# EAGLE board picasso (EAGLE 7.2.0)
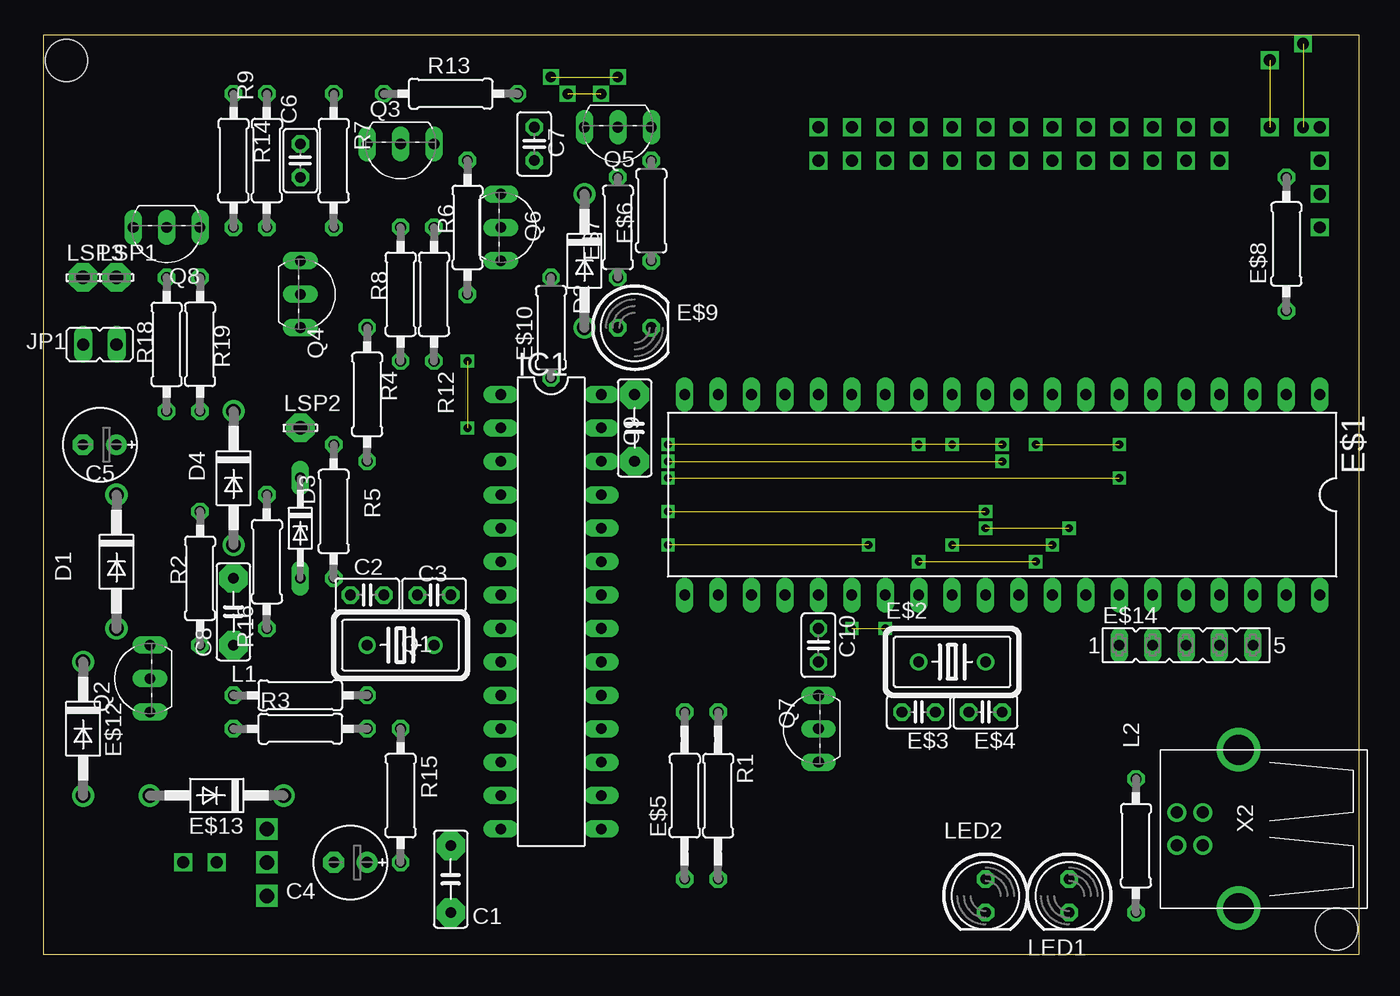
[diagram p0: board, top side]
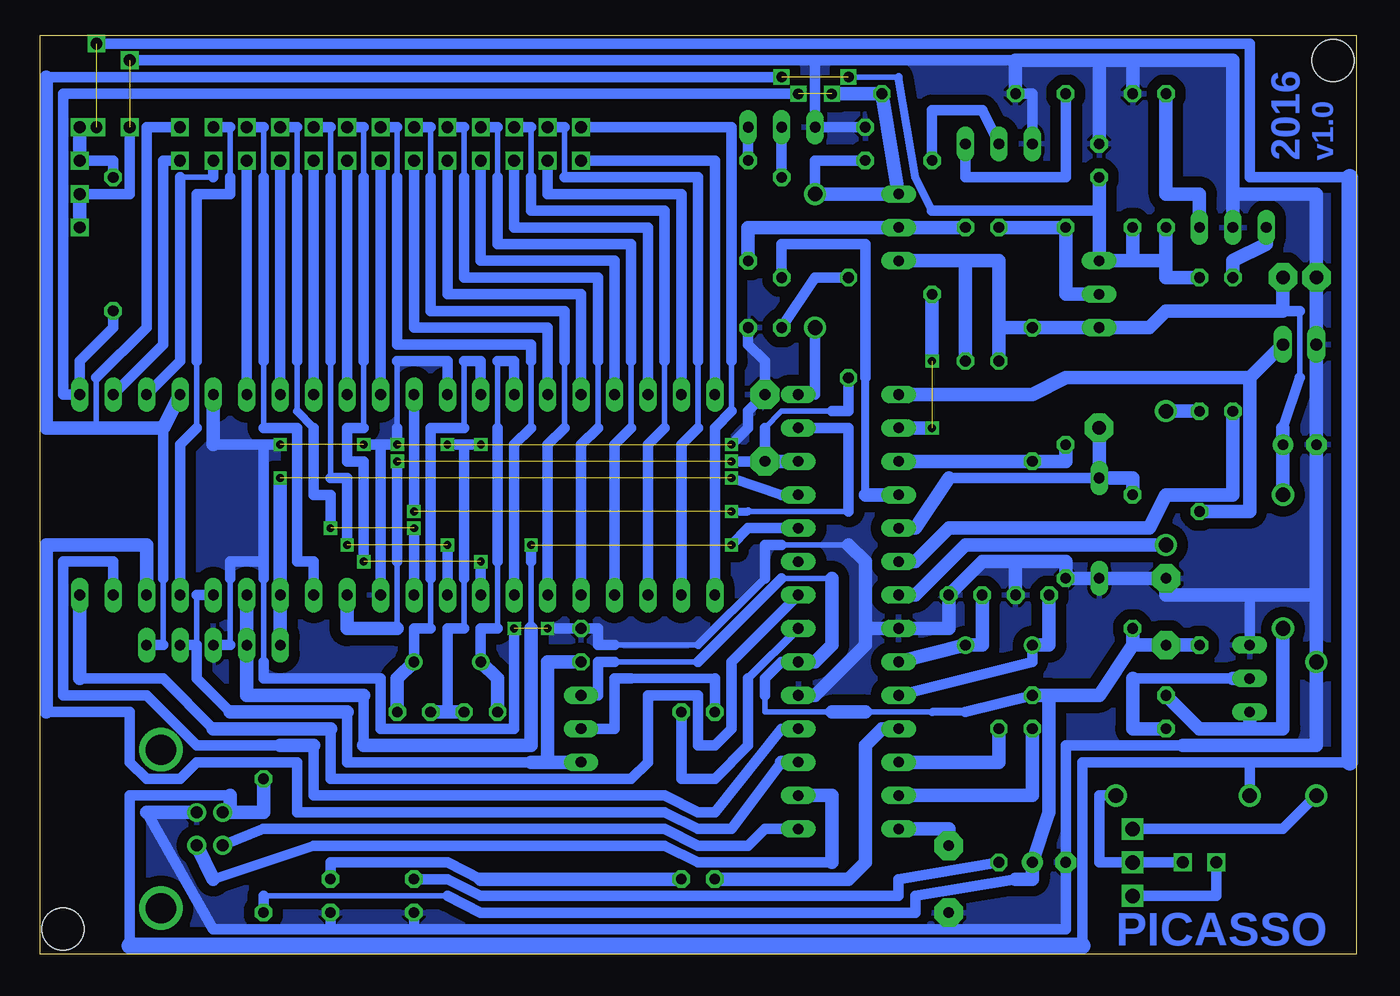
[diagram p1: board, bottom side, seen from below]

Size 100 x 69.84 mm. Coordinates in mm from the lower left corner, seen from the top.
Outline: 0,0 100,0 100,69.84 0,69.84 0,0
Copper layers (1*16): Top 0.035mm / dielectric 1.5mm / Bottom 0.035mm
Design rules "default": minimum track width 10mil, minimum drill 24mil, track to track 8mil, track to pad 8mil, pad to pad 8mil, via to via 8mil, smd to smd 8mil, copper to edge 40mil, drill to drill 8mil, minimum pad ring 10mil, minimum via ring 8mil, stop-mask expansion 4mil, vias tented up to drill 0mil, thermal gap 10mil
Holes 3.2 mm at 1.74,67.94 98.26,1.9

## Footprints (pad centres in the part's own frame; a part is rotated, then mirrored left to right if it is on the bottom)
C050-025X075 = drill 0.813 pad 2.184 octagon: 1 -2.54,0; 2 2.54,0
C025-025X050 = drill 0.813 octagon: 1 -1.27,0; 2 1.27,0
E2,5-6E = drill 0.813 pad 1.575: + -1.27,0 | drill 0.813 pad 1.575 octagon: - 1.27,0
DO41-10 = drill 1.118: A 5.08,0; C -5.08,0
DO34Z7 = drill 0.813 long: A 3.81,0; C -3.81,0
DIL40 = drill 0.813 long: 1 -24.13,-7.62; 2 -21.59,-7.62; 3 -19.05,-7.62; 4 -16.51,-7.62; 5 -13.97,-7.62; 6 -11.43,-7.62; 7 -8.89,-7.62; 8 -6.35,-7.62; 9 -3.81,-7.62; 10 -1.27,-7.62; 11 1.27,-7.62; 12 3.81,-7.62; 13 6.35,-7.62; 14 8.89,-7.62; 15 11.43,-7.62; 16 13.97,-7.62; 17 16.51,-7.62; 18 19.05,-7.62; 19 21.59,-7.62; 20 24.13,-7.62; 21 24.13,7.62; 22 21.59,7.62; 23 19.05,7.62; 24 16.51,7.62; 25 13.97,7.62; 26 11.43,7.62; 27 8.89,7.62; 28 6.35,7.62; 29 3.81,7.62; 30 1.27,7.62; 31 -1.27,7.62; 32 -3.81,7.62; 33 -6.35,7.62; 34 -8.89,7.62; 35 -11.43,7.62; 36 -13.97,7.62; 37 -16.51,7.62; 38 -19.05,7.62; 39 -21.59,7.62; 40 -24.13,7.62
HC18U-V = drill 0.813: 1 -2.54,0; 2 2.54,0
0207/12 = drill 0.813 octagon: 1 -6.35,0; 2 6.35,0
0207/7 = drill 0.813 octagon: 1 -3.81,0; 2 3.81,0
0207/10 = drill 0.813 octagon: 1 -5.08,0; 2 5.08,0
LED5MM = drill 0.813 octagon: A -1.27,0; K 1.27,0
FE05-1 = drill 0.813 long: 1 -5.08,0; 2 -2.54,0; 3 0,0; 4 2.54,0; 5 5.08,0
DIL28-3 = drill 0.813 long: 1 -16.51,-3.81; 2 -13.97,-3.81; 3 -11.43,-3.81; 4 -8.89,-3.81; 5 -6.35,-3.81; 6 -3.81,-3.81; 7 -1.27,-3.81; 8 1.27,-3.81; 9 3.81,-3.81; 10 6.35,-3.81; 11 8.89,-3.81; 12 11.43,-3.81; 13 13.97,-3.81; 14 16.51,-3.81; 15 16.51,3.81; 16 13.97,3.81; 17 11.43,3.81; 18 8.89,3.81; 19 6.35,3.81; 20 3.81,3.81; 21 1.27,3.81; 22 -1.27,3.81; 23 -3.81,3.81; 24 -6.35,3.81; 25 -8.89,3.81; 26 -11.43,3.81; 27 -13.97,3.81; 28 -16.51,3.81
JP1 = drill 0.914 long: 1 0,-1.27; 2 0,1.27
LSP10 = drill 1.016 pad 2.159 octagon: MP 0,0
TO92-EBC = drill 0.813 long: B 0,-1.27; C -2.54,-1.27; E 2.54,-1.27
TO92-BEC = drill 0.813 long: B 2.54,0; C -2.54,0; E 0,0
USB-B-H = drill 0.914: D+ 0,1.25; D- 1.981,1.25; GND 0,-1.25; VBUS 1.981,-1.25 | drill 2.286: P$1 -2.718,-6.02; P$2 -2.718,6.02

## Placement (x,y rotation side)
C1  220nF  [C050-025X075]  30.95,5.71 270 top
C2  22p  [C025-025X050]  24.6,27.3 0 top
C3  22p  [C025-025X050]  29.68,27.3 0 top
C4  10µF  [E2,5-6E]  23.33,6.98 180 top
C5  47µF  [E2,5-6E]  4.28,38.73 180 top
C6  1nF  [C025-025X050]  19.52,60.32 90 top
C7  1nF  [C025-025X050]  37.3,61.59 90 top
C8  100nF  [C050-025X075]  14.44,26.03 90 top
C9  100nF  [C050-025X075]  44.92,40 270 top
C10  100nF  [C025-025X050]  58.89,23.49 270 top
D1  BAT43  [DO41-10]  5.55,29.84 270 top
D2  BAT43  [DO41-10]  41.11,52.7 270 top
D3  BZX97-3,3  [DO34Z7]  19.52,32.38 270 top
D4  BAT43  [DO41-10]  14.44,36.19 270 top
E$1  PIC16F877A  [DIL40]  72.86,34.92 180 top
E$2  20mHz  [HC18U-V]  69.05,22.22 0 top
E$3  22pf  [C025-025X050]  66.51,18.41 180 top
E$4  22pf  [C025-025X050]  71.59,18.41 180 top
E$5  10K  [0207/12]  48.73,12.06 90 top
E$6  [0207/7]  46.19,56.51 90 top
E$7  [0207/7]  43.65,55.24 90 top
E$8  1K  [0207/10]  94.45,53.97 90 top
E$9  red  [LED5MM]  44.92,47.62 0 top
E$10  100  [0207/7]  38.57,47.62 90 top
E$12  1n4001  [DO41-10]  3.01,17.14 270 top
E$13  1n4001  [DO41-10]  13.17,12.06 180 top
E$14  ICSP  [FE05-1]  86.83,23.49 0 top
IC1  PIC18F2550SP  [DIL28-3]  38.57,26.03 270 top
JP1  [JP1]  4.28,46.35 90 top
L1  680µH  [0207/10]  19.52,19.68 180 top
L2  10µH  [0207/10]  83.02,8.25 270 top
LED1  green  [LED5MM]  77.94,4.44 270 top
LED2  yellow  [LED5MM]  71.59,4.44 270 top
LSP1  [LSP10]  5.55,51.43 0 top
LSP2  LSP10  [LSP10]  19.52,40 0 top
LSP3  [LSP10]  3.01,51.43 0 top
Q1  20 MHz  [HC18U-V]  27.14,23.49 0 top
Q2  BC338-25  [TO92-EBC]  6.82,20.95 90 top
Q3  BC338-25  [TO92-EBC]  27.14,60.32 180 top
Q4  BC328-25  [TO92-EBC]  20.79,50.16 270 top
Q5  BC338-25  [TO92-EBC]  43.65,61.59 180 top
Q6  BC328-25  [TO92-EBC]  36.03,55.24 270 top
Q7  BC328-25  [TO92-EBC]  57.62,17.14 90 top
Q8  BF959  [TO92-BEC]  9.36,55.24 180 top
R1  100  [0207/12]  51.27,12.06 270 top
R2  10 k  [0207/10]  11.9,28.57 270 top
R3  10k  [0207/10]  19.52,17.14 0 top
R4  4k7  [0207/10]  24.6,42.54 90 top
R5  2k2  [0207/10]  22.06,33.65 90 top
R6  10k  [0207/10]  32.22,55.24 270 top
R7  10k  [0207/10]  22.06,60.32 270 top
R8  100k  [0207/10]  27.14,50.16 270 top
R9  10k  [0207/10]  16.98,60.32 270 top
R12  100k  [0207/10]  29.68,50.16 270 top
R13  10k  [0207/10]  30.95,65.4 0 top
R14  100  [0207/10]  14.44,60.32 270 top
R15  100  [0207/10]  27.14,12.06 90 top
R16  330  [0207/10]  16.98,29.84 270 top
R18  10k  [0207/10]  9.36,46.35 270 top
R19  100  [0207/10]  11.9,46.35 90 top
X2  USB-B-H  [USB-B-H]  88.1,9.52 180 top

## Library data of the parts
C1-C10 E$3-E$8 E$10 L1 L2 R1-R9 R12-R16 R18 R19 = rcl
D1-D4 E$12 E$13 = diode
E$1 = microchip
E$2 Q1 = crystal
E$9 LED1 LED2 = led
E$14 = con-lsta
IC1 Q8 = sprut
JP1 = jumper
LSP1-LSP3 = solpad
Q2 Q3 Q5 = transistor-npn
Q4 Q6 Q7 = transistor-pnp
X2 = con-usb

## Nets
+12V: C5.+ D1.C LSP1.MP Q4.E Q6.E R4.2 R8.2 R12.2
CLOCK_18: E$1.34 E$14.1 IC1.25
CLOCK_28_40: E$1.39 IC1.18
DATA_18: E$1.35 IC1.24
DATA_28_40: E$1.40 IC1.22
GND: C1.2 C2.2 C3.2 C4.- C5.- C6.2 C7.2 C8.2 C9.1 C10.1 D3.A E$1.31 E$9.K E$14.3 IC1.8 IC1.19 JP1.2 LED1.K LED2.K LSP3.MP Q2.E Q3.E Q5.E Q8.E R5.1 R9.1 R13.1 X2.GND
N$1: IC1.15 X2.D-
N$2: IC1.16 X2.D+
N$3: L2.1 X2.VBUS
N$4: LED1.A R1.2
N$5: C1.1 IC1.14
N$6: C2.1 IC1.10 Q1.1
N$7: C3.1 IC1.9 Q1.2
N$8: IC1.1 JP1.1 R2.1
N$9: E$7.2 Q5.B
N$10: IC1.12 R15.2
N$11: E$1.38 IC1.17
N$12: LED2.A R15.1
N$13: D1.A L1.2 Q2.C
N$14: Q2.B R3.1
N$15: IC1.13 R3.2
N$16: IC1.21 R1.1
N$17: Q6.B R12.1
N$18: IC1.3 R4.1 R5.2
N$20: E$6.2 Q5.C
N$21: Q3.B R6.1
N$22: IC1.6 R18.2
N$23: Q3.C R7.1
N$24: Q4.B R7.2 R8.1
N$25: IC1.11
N$26: D4.A IC1.7
N$27: Q8.C R14.1
N$28: IC1.2 R6.2
N$29: E$7.1 IC1.4
N$30: D2.A IC1.28
N$31: D4.C R19.1
N$32: E$1.11 IC1.27
N$33: Q8.B R18.1
S$1: Q7.C
S$2: E$1.14
S$3: C4.+ C8.1 IC1.20 L1.1 L2.2 Q7.E R2.2 R16.2
S$4: Q7.B
S$5: E$1.13
S$6: E$3.1 E$4.2
S$8: E$2.2 E$4.1
S$9: E$2.1 E$3.2
S$10: E$1.21
S$11: E$1.22
S$12: E$1.23
S$13: E$1.24
S$14: E$1.25
S$15: E$1.26
S$16: E$1.27
S$17: E$9.A
S$18: E$1.33
S$19: E$1.28
S$20: E$1.29
S$21: E$1.30
S$22: C9.2 E$1.32 E$10.1 IC1.26
S$23: E$1.20
S$24: E$1.19
S$25: E$1.2
S$27: E$1.18
S$28: E$1.17
S$29: E$12.A
S$30: E$1.10
S$31: E$1.9
S$32: E$1.8
S$33: E$1.7
S$34: E$1.6
S$35: E$1.15
S$36: E$1.16
S$37: E$13.C
S$48: E$1.37
S$50: E$1.3
S$53: E$8.2 E$13.A
UREF: D3.C IC1.5 LSP2.MP R16.1
VDD_18: C10.2 E$1.36 E$14.4
VPP_8_14_18: C7.1 D2.C E$1.1 E$8.1 Q6.C R13.2
VPP_28_40: C6.1 E$1.4 E$14.5 Q4.C R9.2 R14.2 R19.2

## Tracks (layer width: path | path; a pad name or v marks a point on that pad's centre or on a via)
+12V
  Bottom 0.406: 4.28,43.81 4.28,48.89
  Bottom 0.813: 5.55,40 4.28,43.81 | 4.28,48.89 5.55,48.89
  Bottom 1.016: Q6.E 29.68,52.7 | 29.68,52.7 R12.2 | 27.14,47.62 27.14,52.7 29.68,52.7 | D1.C C5.+ 5.55,40 | 27.14,47.62 R4.2 Q4.E 15.71,47.62 14.44,48.89 5.55,48.89 LSP1.MP | 27.14,47.62 R8.2
CLOCK_18  (via drill 0.6)  (1 unrouted)
  Bottom 0.813: IC1.25 43.65,34.92 v47.46,36.19
  Bottom 1.016: v81.75,36.19 E$1.34 E$14.1
CLOCK_28_40
  Bottom 0.813: E$1.39 94.45,29.84 98.26,29.84 98.26,19.68 91.91,19.68 88.1,15.87 81.75,15.87 | 79.21,15.87 79.21,12.06 52.54,12.06 50,10.79 48.73,10.79 43.65,17.14 IC1.18
  Bottom 1.016: 81.75,15.87 79.21,15.87
DATA_18  (via drill 0.6)  (1 unrouted)
  Bottom 0.406: 62.7,24.76 62.7,29.84
  Bottom 0.813: 75.4,15.87 75.4,19.68 | v47.46,31.11 46.19,32.38 IC1.24 | v62.7,31.11 62.7,29.84
  Bottom 1.016: 62.7,24.76 62.7,15.87 75.4,15.87 | 75.4,19.68 84.29,19.68 E$1.35
DATA_28_40
  Bottom 0.813: 96.99,20.95 90.64,20.95 86.83,17.14 | 77.94,17.14 77.94,13.33 55.08,13.33 53.81,14.6 53.81,19.68 50,19.68 50,15.87 48.73,15.87 47.46,17.14 47.46,22.22 IC1.22
  Bottom 1.016: E$1.40 96.99,20.95 | 86.83,17.14 77.94,17.14
GND  (via drill 0.6, 0.9)  (4 unrouted)
  Bottom 0.406: 72.86,45.08 72.86,40 | 83.02,22.22 83.02,28.57 | 50,23.49 56.35,23.49 | 38.57,31.11 43.65,31.11 | 85.56,28.57 85.56,23.49
  Bottom 0.61: 44.92,28.57 50,23.49
  Bottom 0.813: Q3.E 24.6,65.4 R13.1 | 25.87,67.94 41.11,67.94 | C7.2 Q5.E 41.11,67.94 | 69.05,42.54 69.05,45.08 72.86,45.08 | v47.46,38.73 46.19,40 46.19,41.27 C9.1 44.92,45.08 46.19,46.35 E$9.K | v63.97,24.76 63.97,17.14 74.13,17.14 74.13,20.95 83.02,20.95 83.02,22.22 | 43.65,31.11 44.92,31.11 44.92,28.57 | Q2.E 8.09,27.3 | 13.17,15.87 22.06,15.87 C4.- 22.06,1.9 30.95,1.9 | 30.95,1.9 71.59,1.9 | 71.59,1.9 LED2.K | 83.02,38.73 86.83,38.73 | 30.95,1.9 C1.2 | 71.59,1.9 77.94,1.9 | LED1.K 77.94,1.9 | 77.94,1.9 86.83,1.9 91.89,10.77 | 74.13,38.73 v72.86,38.73 72.86,40 | v75.4,38.73 74.13,38.73 | 74.13,38.73 E$1.31 | v81.75,38.73 83.02,38.73 | 83.02,38.73 83.02,29.84 | v61.43,24.76 C10.1 57.62,24.76 57.62,23.49 56.35,23.49 | 41.11,67.94 v93.18,67.94 | 83.02,29.84 85.56,29.84 85.56,28.57 | 83.02,29.84 83.02,28.57 | E$14.3 85.56,23.49
  Bottom 1.016: 16.98,67.94 19.52,67.94 | C6.2 19.52,67.94 | 19.52,67.94 25.87,67.94 R13.1 | 37.3,24.76 IC1.8 30.95,24.76 C3.2 28.41,29.84 25.87,29.84 | 37.3,24.76 37.3,29.84 38.57,31.11 | IC1.19 41.11,19.68 37.3,23.49 37.3,24.76 | 13.17,15.87 3.01,15.87 3.01,27.3 | 3.01,27.3 C5.- JP1.2 LSP3.MP 3.01,57.78 9.36,57.78 | 3.01,27.3 8.09,27.3 14.44,27.3 C8.2 D3.A R5.1 22.06,29.84 25.87,29.84 | 86.83,38.73 86.83,42.54 | X2.GND 91.89,10.77 | 25.87,29.84 C2.2 | 16.98,67.94 9.36,67.94 9.36,57.78 | 16.98,67.94 R9.1 | Q8.E 9.36,57.78
  pour Bottom (isolate 0.813): -0.8,70.48 100.8,70.48 100.8,-0.64 -0.8,-0.64
N$1
  Bottom 0.813: X2.D- 83.04,9.54 70.32,9.52 52.54,9.52 50,8.25 46.19,8.25 44.92,9.52 IC1.15
N$2
  Bottom 0.813: 39.84,6.98 50,6.98 52.54,8.25 79.21,8.25 86.83,5.71
  Bottom 1.016: 86.83,5.71 X2.D+ | IC1.16 39.84,12.06 39.84,6.98
N$3
  Bottom 1.016: X2.VBUS 83.02,10.77 L2.1
N$4
  Bottom 0.813: 66.51,5.71 69.05,6.98 77.94,6.98 LED1.A
  Bottom 1.016: R1.2 66.51,5.71
N$5
  Bottom 1.016: C1.1 30.95,9.52 IC1.14
N$6
  Bottom 0.813: IC1.10 24.6,22.22 Q1.1
  Bottom 1.016: Q1.1 23.33,23.49 C2.1
N$7
  Bottom 1.016: IC1.9 Q1.2 28.41,23.49 C3.1
N$8
  Bottom 1.016: 8.09,43.81 22.06,43.81 24.6,42.54 IC1.1 | JP1.1 8.09,43.81 | 8.09,43.81 8.09,33.65 R2.1
N$9
  Bottom 0.813: Q5.B E$7.2
N$10
  Bottom 1.016: R15.2 27.14,14.6 IC1.12
N$11
  Bottom 0.813: 43.65,14.6 47.46,9.52 50,9.52 52.54,10.79 80.48,10.79 80.48,14.6 88.1,14.6 89.37,13.33 91.91,13.33 93.18,14.6 93.18,18.41 99.53,18.41
  Bottom 1.016: IC1.17 43.65,14.6 | E$1.38 91.91,31.11 99.53,31.11 99.53,18.41
N$12
  Bottom 0.813: LED2.A 69.05,5.71 66.51,4.44 34.76,4.44 34.76,5.71 R15.1
N$13
  Bottom 1.016: Q2.C 8.09,17.14 | 8.09,17.14 5.55,17.14 D1.A | L1.2 11.9,17.14 8.09,17.14
N$14
  Bottom 0.813: 9.36,20.95 16.98,20.95
  Bottom 1.016: Q2.B 9.36,20.95 | 16.98,20.95 16.98,17.14 R3.1
N$15
  Bottom 1.016: R3.2 24.6,12.06 IC1.13
N$16
  Bottom 0.61: IC1.21 46.19,20.95
  Bottom 0.813: R1.1 51.27,13.33 48.73,13.33 46.19,15.87 46.19,20.95
N$17
  Bottom 1.016: 46.19,52.7 46.19,55.24 Q6.B R12.1
N$18
  Bottom 1.016: IC1.3 R4.1 22.06,37.46 R5.2
N$20
  Bottom 0.813: E$6.2 Q5.C
N$21
  Bottom 0.813: Q3.B 28.41,64.13 32.22,64.13 R6.1
N$22
  Bottom 1.016: IC1.6 33.49,29.84 30.95,32.38 15.71,32.38 14.44,34.92 9.36,34.92 R18.2
N$23
  Bottom 0.813: R7.1 22.06,59.05 29.68,59.05 Q3.C
N$24
  Bottom 1.016: Q4.B 22.06,50.16 R7.2 R8.1
N$25
  Bottom 1.016: IC1.11 36.03,17.14 37.3,15.87 37.3,6.98 38.57,5.71 48.73,5.71
N$26
  Bottom 1.016: IC1.7 33.49,27.3 29.68,31.11 D4.A
N$27
  Bottom 1.016: Q8.C 11.9,57.78 14.44,57.78 R14.1
N$28  (via drill 0.6)  (1 unrouted)
  Bottom 1.016: IC1.2 v32.22,40 | R6.2 v32.22,45.08
N$29
  Bottom 0.61: 37.3,34.92 37.3,43.81
  Bottom 0.813: 37.3,43.81 37.3,53.97 43.65,53.97 E$7.1
  Bottom 1.016: IC1.4 37.3,34.92
N$30
  Bottom 0.813: IC1.28 41.11,42.54 D2.A
N$31
  Bottom 1.016: D4.C R19.1
N$32  (via drill 0.6)  (1 unrouted)
  Bottom 0.406: 38.57,33.65 46.19,33.65
  Bottom 0.61: v47.46,33.65 46.19,33.65
  Bottom 0.813: IC1.27 38.57,40 38.57,33.65 | E$1.11 v71.59,33.65
N$33
  Bottom 1.016: Q8.B 6.82,53.97 9.36,52.7 R18.1
S$1
  Bottom 1.016: Q7.C 62.7,14.6
S$2
  Bottom 0.813: 65.24,45.08 63.97,45.08 E$1.14
S$3
  Bottom 0.406: 83.02,4.44 69.05,4.44 | 39.84,28.57 43.65,28.57 | 32.22,18.41 37.3,18.41 | 39.84,18.41 44.92,18.41 44.92,19.68 | 56.35,22.22 50,22.22
  Bottom 0.61: 29.68,18.41 32.22,18.41
  Bottom 0.813: 69.05,4.44 66.51,3.17 33.49,3.17 33.49,4.44 25.87,5.71 | 44.92,19.68 44.92,20.95 43.65,22.22 IC1.20 | L1.1 29.68,18.41 | 56.35,22.22 57.62,22.22 57.62,19.68 Q7.E | 50,22.22 43.65,28.57 | L2.2 83.02,4.44
  Bottom 1.016: IC1.20 41.11,22.22 39.84,23.49 39.84,28.57 | 37.3,18.41 39.84,18.41 | R2.2 C8.1 16.98,23.49 | 23.33,19.68 19.52,19.68 16.98,23.49 | R16.2 16.98,23.49 | 25.87,5.71 24.6,5.71 C4.+ 23.33,10.79 23.33,19.68 | 23.33,19.68 L1.1
S$4
  Bottom 0.61: 57.62,17.14 Q7.B
  Bottom 0.711: 48.73,20.95 55.08,20.95
  Bottom 0.813: 48.73,18.41 48.73,20.95 | 55.08,20.95 56.35,20.95 56.35,17.14 57.62,17.14
S$5
  Bottom 0.813: 67.78,45.08 66.51,45.08 E$1.13
S$6
  Bottom 0.406: 67.78,24.76 67.78,28.57
  Bottom 0.813: 69.05,18.41 69.05,24.76 67.78,24.76 | 67.78,28.57 67.78,38.73
  Bottom 1.016: E$3.1 69.05,18.41 E$4.2
S$7  (via drill 0.6)
  Bottom 0.813: v69.05,38.73 v66.51,38.73
S$8
  Bottom 0.406: 70.32,24.76 70.32,28.57 | 67.78,40 67.78,45.08
  Bottom 0.813: E$2.2 71.59,24.76 70.32,24.76 | 70.32,28.57 70.32,40 67.78,40
  Bottom 1.016: E$4.1 72.86,20.95 E$2.2
S$9
  Bottom 0.406: 65.24,24.76 65.24,29.84 | 65.24,40 65.24,45.08
  Bottom 0.813: E$2.1 66.51,24.76 65.24,24.76 | 65.24,29.84 65.24,40
  Bottom 1.016: E$3.2 65.24,20.95 E$2.1
S$10  (via drill 0.9)
  Bottom 0.406: 47.46,41.27 47.46,45.08
  Bottom 0.813: E$1.21 48.73,40 47.46,41.27 | 47.46,45.08 47.46,62.86 v58.89,62.86
S$11  (via drill 0.9)
  Bottom 0.406: 50,40 50,45.08 | 60.16,59.05 60.16,62.86
  Bottom 0.813: E$1.22 51.27,38.73 50,40 | 50,45.08 50,59.05 60.16,59.05 | 60.16,62.86 v61.43,62.86
S$12  (via drill 0.9)
  Bottom 0.406: 52.54,40 52.54,45.08 | 62.7,59.05 62.7,62.86
  Bottom 0.813: E$1.23 53.81,38.73 52.54,40 | 52.54,45.08 52.54,56.51 62.7,56.51 62.7,59.05 | 62.7,62.86 v63.97,62.86
S$13  (via drill 0.9)
  Bottom 0.406: 55.08,40 55.08,45.08 | 65.24,59.05 65.24,62.86
  Bottom 0.813: E$1.24 56.35,38.73 55.08,40 | 55.08,45.08 55.08,53.97 65.24,53.97 65.24,59.05 | 65.24,62.86 v66.51,62.86
S$14  (via drill 0.9)
  Bottom 0.406: 57.62,40 57.62,45.08 | 67.78,59.05 67.78,62.86
  Bottom 0.813: E$1.25 58.89,38.73 57.62,40 | 57.62,45.08 57.62,51.43 67.78,51.43 67.78,59.05 | 67.78,62.86 v69.05,62.86
S$15  (via drill 0.9)
  Bottom 0.406: 60.16,40 60.16,45.08 | 70.32,59.05 70.32,62.86
  Bottom 0.813: E$1.26 61.43,38.73 60.16,40 | 60.16,45.08 60.16,48.89 70.32,48.89 70.32,59.05 | 70.32,62.86 v71.59,62.86
S$16  (via drill 0.9)
  Bottom 0.406: 62.7,40 62.7,45.08 | 72.86,59.05 72.86,62.86
  Bottom 0.813: E$1.27 63.97,38.73 62.7,40 | 62.7,45.08 62.7,46.35 72.86,46.35 72.86,59.05 | 72.86,62.86 v74.13,62.86
S$17
  Bottom 0.813: E$9.A 41.11,51.43 38.57,51.43
S$18  (via drill 0.9)
  Bottom 0.406: 83.02,40 83.02,45.08 | 83.02,59.05 83.02,62.86
  Bottom 0.813: E$1.33 79.21,29.84 80.48,29.84 80.48,40 83.02,40 | 83.02,45.08 83.02,59.05 | 83.02,62.86 v84.29,62.86
S$19  (via drill 0.6, 0.9)  (1 unrouted)
  Bottom 0.406: 75.4,40 75.4,45.08 | 75.4,59.05 75.4,62.86
  Bottom 0.813: E$1.28 v66.51,29.84 | v75.4,29.84 75.4,37.46 76.67,37.46 76.67,40 75.4,40 | 75.4,45.08 75.4,59.05 | 75.4,62.86 v76.67,62.86
S$20  (via drill 0.6, 0.9)  (1 unrouted)
  Bottom 0.406: 77.94,36.19 77.94,45.08 | 77.94,59.05 77.94,62.86
  Bottom 0.813: E$1.29 v69.05,31.11 | v76.67,31.11 76.67,36.19 77.94,36.19 | 77.94,45.08 77.94,59.05 | 77.94,62.86 v79.21,62.86
S$21  (via drill 0.6, 0.9)  (1 unrouted)
  Bottom 0.406: 80.48,41.27 80.48,45.08 | 80.48,59.05 80.48,62.86
  Bottom 0.61: 79.21,40 80.48,41.27
  Bottom 0.813: E$1.30 v71.59,32.38 | v77.94,32.38 77.94,34.92 79.21,34.92 79.21,40 | 80.48,45.08 80.48,59.05 | 80.48,62.86 v81.75,62.86
S$22  (via drill 0.6)  (1 unrouted)
  Bottom 0.406: 39.84,41.27 43.65,41.27 44.92,40 | 72.86,29.84 72.86,24.76
  Bottom 0.813: E$10.1 38.57,41.27 39.84,41.27 | 72.86,29.84 v72.86,37.46 | v47.46,37.46 C9.2 44.92,40
  Bottom 1.016: 72.86,24.76 76.67,24.76 E$1.32 | IC1.26 C9.2
S$23  (via drill 0.9)
  Bottom 0.813: E$1.20 48.73,60.32 v58.89,60.32
S$24  (via drill 0.9)
  Bottom 0.813: E$1.19 51.27,57.78 61.43,57.78 v61.43,60.32
S$25  (via drill 0.9)
  Bottom 0.813: E$1.2 90.64,46.35 90.64,60.32 v89.37,60.32
S$26  (via drill 0.6, 0.9)
  Bottom 0.813: v96.99,57.78 93.18,57.78 v93.18,62.86
  Bottom 1.016: v96.99,55.24 v96.99,57.78
S$27  (via drill 0.9)
  Bottom 0.813: E$1.18 53.81,55.24 63.97,55.24 v63.97,60.32
S$28  (via drill 0.9)
  Bottom 0.813: E$1.17 56.35,52.7 66.51,52.7 v66.51,60.32
S$29  (via drill 1.1)
  Bottom 0.813: v16.98,9.52 5.55,9.52 E$12.A
S$30  (via drill 0.9)
  Bottom 0.813: E$1.10 v74.13,60.32
S$31  (via drill 0.9)
  Bottom 0.813: E$1.9 v76.67,60.32
S$32  (via drill 0.9)
  Bottom 0.813: E$1.8 v79.21,60.32
S$33  (via drill 0.9)
  Bottom 0.813: E$1.7 v81.75,60.32
S$34  (via drill 0.9)
  Bottom 0.813: E$1.6 v84.29,60.32
S$35  (via drill 0.9)
  Bottom 0.813: E$1.15 61.43,47.62 71.59,47.62 v71.59,60.32
S$36  (via drill 0.9)
  Bottom 0.813: E$1.16 58.89,50.16 69.05,50.16 v69.05,60.32
S$37  (via drill 0.9, 1.1)
  Bottom 0.813: v13.17,6.98 v16.98,6.98 19.52,6.98 19.52,12.06 E$13.C
S$40  (via drill 0.9, 1.1)
  Bottom 0.813: v10.63,6.98 10.63,4.44 v16.98,4.44
S$48  (via drill 0.9)
  Bottom 0.406: 88.1,40 88.1,45.08 | 85.56,59.05 85.56,62.86
  Bottom 0.813: E$1.37 89.37,38.73 88.1,40 | 88.1,45.08 88.1,57.78 85.56,57.78 85.56,59.05 | 85.56,62.86 v86.83,62.86
S$50  (via drill 0.9)
  Bottom 0.406: 89.37,59.05 86.83,59.05
  Bottom 0.813: E$1.3 89.37,45.08 89.37,59.05 | 86.83,59.05 v86.83,60.32
S$53  (via drill 0.6, 0.9)  (1 unrouted)
  Bottom 0.813: 85.56,12.06 93.18,12.06 93.18,0.63 | 20.79,0.63 20.79,14.6 8.09,14.6 | 8.09,14.6 0.47,14.6 | 0.47,59.05 8.09,59.05 8.09,69.21 v95.72,69.21 | v95.72,62.86 v96.99,62.86 | v96.99,60.32 94.45,60.32 E$8.2 | 8.09,14.6 E$13.A
  Bottom 1.016: 85.56,10.79 85.56,12.06 | v96.99,60.32 v96.99,62.86
  Bottom 1.27: 0.47,59.05 0.47,14.6 | 93.18,0.63 20.79,0.63
UREF
  Bottom 0.813: D3.C 30.95,36.19
  Bottom 1.016: IC1.5 33.49,32.38 30.95,36.19 | R16.1 16.98,36.19 D3.C LSP2.MP
VDD_18
  Bottom 0.406: 88.1,23.49 88.1,27.3
  Bottom 0.813: 61.43,14.6 76.67,14.6 76.67,18.41 | 85.56,18.41 88.1,20.95 88.1,23.49 E$14.4 | E$1.36 88.1,27.3
  Bottom 1.016: C10.2 61.43,22.22 61.43,14.6 | 76.67,18.41 85.56,18.41
VPP_8_14_18  (via drill 0.8)  (1 unrouted)
  Bottom 0.813: v42.38,65.4 98.26,65.4 98.26,42.54 E$1.1 96.99,45.08 94.45,47.62 E$8.1 | C7.1 41.11,60.32 D2.C
  Bottom 1.016: v39.84,65.4 R13.2 Q6.C D2.C
VPP_28_40  (via drill 0.6, 0.8, 0.9)  (1 unrouted)
  Bottom 0.406: 34.76,66.67 v38.57,66.67 | 95.72,40 95.72,43.81 | 90.64,28.57 90.64,23.49
  Bottom 0.61: 32.22,56.51 33.49,59.05 34.76,66.67
  Bottom 0.813: 99.53,66.67 v43.65,66.67 | 19.52,56.51 32.22,56.51 | 95.72,43.81 91.91,47.62 91.91,62.86 v89.37,62.86 | 90.64,40 90.64,28.57 | E$14.5 90.64,23.49
  Bottom 1.016: E$1.4 90.64,40 95.72,40 99.53,40 99.53,66.67 | C6.1 19.52,56.51 Q4.C 16.98,52.7 | 16.98,52.7 R9.2 | 14.44,52.7 16.98,52.7 | 14.44,52.7 14.44,51.43 R19.2 | 14.44,52.7 R14.2

## Text on the board
Bottom: v1.0 | 2016 | PICASSO